# EAGLE board fb_in_8_230V_02 (EAGLE 4.16)
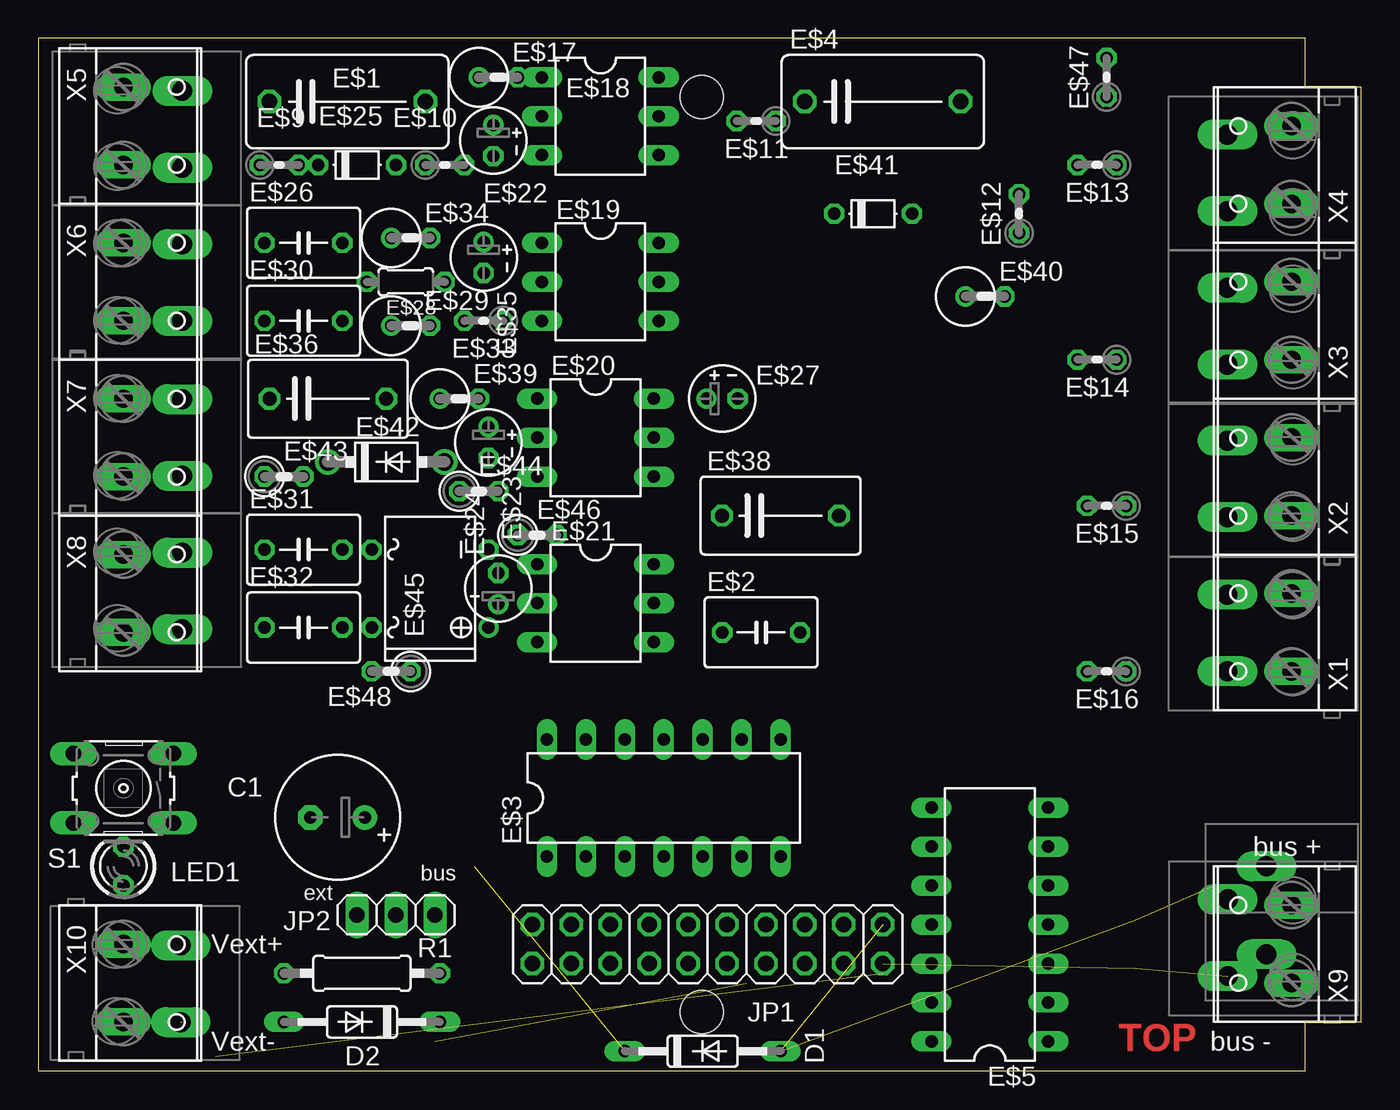
[diagram p0: board, top side]
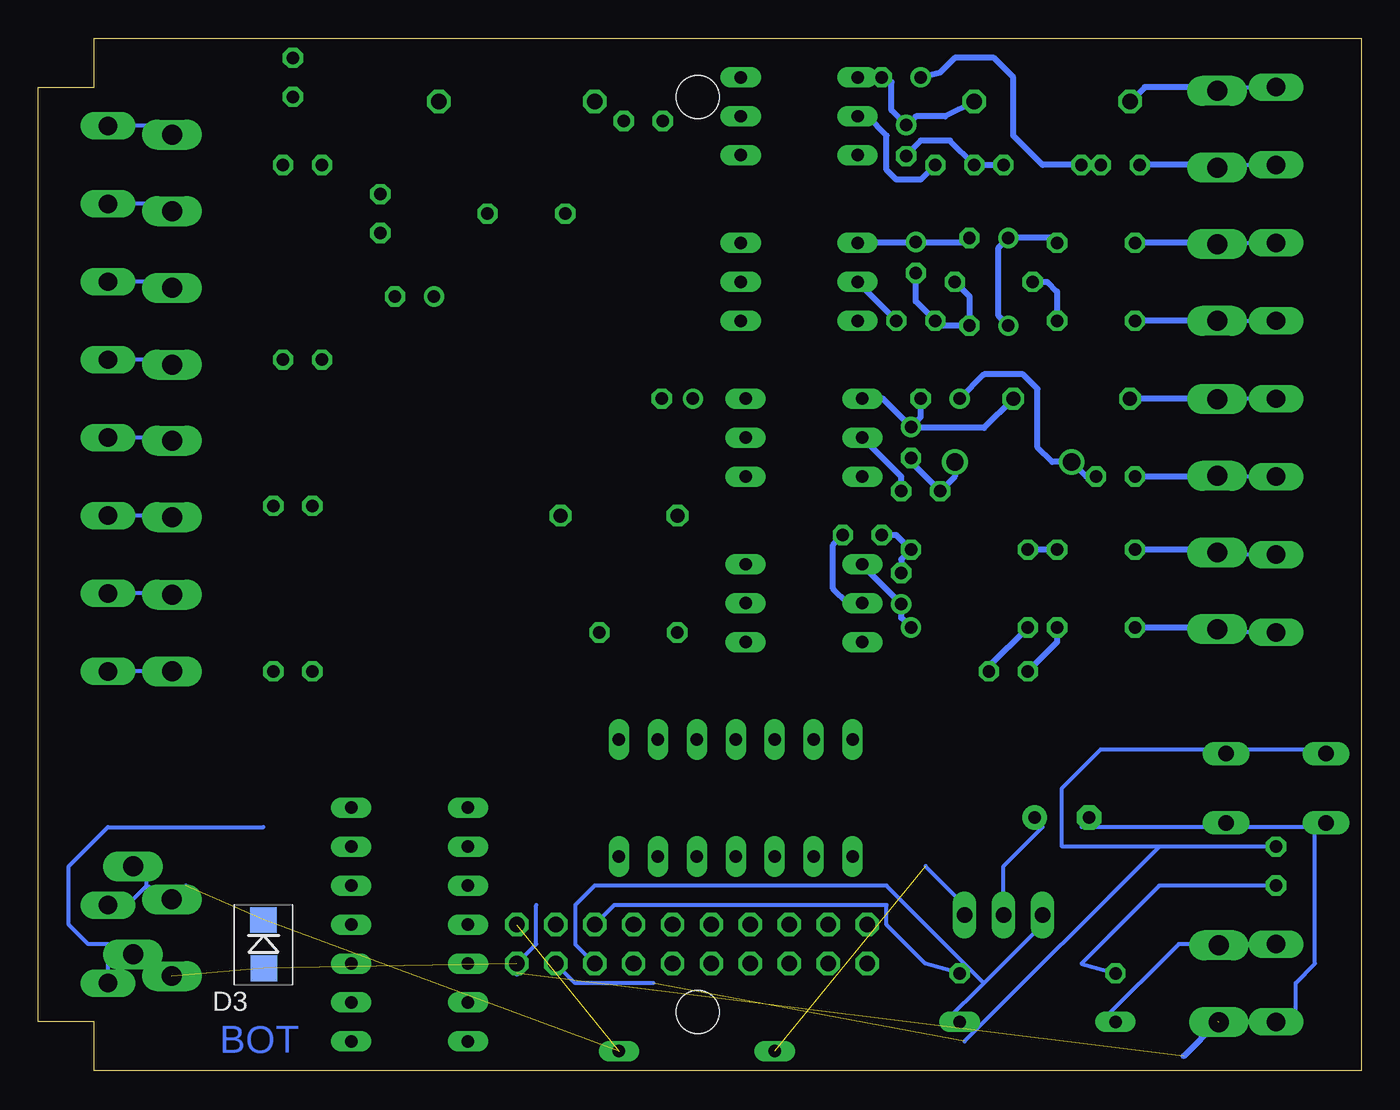
[diagram p1: board, bottom side, seen from below]

Size 86.28 x 67.31 mm. Coordinates in mm from the lower left corner, seen from the top.
Outline: 0,0.01 82.64,0 82.64,3.18 86.28,3.18 86.28,64.13 82.64,64.13 82.64,67.31 0,67.31 0,0.01
Copper layers (1*16): Top 0.035mm / dielectric 1.5mm / Bottom 0.035mm
Design rules "default": minimum track width 10mil, minimum drill 24mil, track to track 16mil, track to pad 12mil, pad to pad 16mil, via to via 16mil, smd to smd 8mil, copper to edge 20mil, drill to drill 10mil, minimum pad ring 10mil, minimum via ring 8mil, stop-mask expansion 4mil, vias tented up to drill 0mil, thermal gap 10mil
Holes 2.8 mm at 43.27,3.81 43.27,63.5
tRestrict: area 36,20.3 to 37.3,67.3; area 57,22.2 to 58.3,69.2
bRestrict: area 57,22.2 to 58.3,69.2; area 36,20.3 to 37.3,67.3

## Footprints (pad centres in the part's own frame; a part is rotated, then mirrored left to right if it is on the bottom)
E3,5-8 = drill 0.813 pad 1.6 round: + -1.778,0 | drill 0.813 pad 1.6 octagon: - 1.778,0
DO35-10 = drill 0.813 long: A 5.08,0; C -5.08,0
SMA = smd 1.67 x 1.73: 1 -1.576,0; 2 1.58,0.014
C102-064X133 = drill 1.016 octagon: 1 -5.08,0; 2 5.08,0
C050-045X075 = drill 0.813 octagon: 1 -2.54,0; 2 2.54,0
DIL14 = drill 0.813 long: 1 -7.62,-3.81; 2 -5.08,-3.81; 3 -2.54,-3.81; 4 0,-3.81; 5 2.54,-3.81; 6 5.08,-3.81; 7 7.62,-3.81; 8 7.62,3.81; 9 5.08,3.81; 10 2.54,3.81; 11 0,3.81; 12 -2.54,3.81; 13 -5.08,3.81; 14 -7.62,3.81
0204V = drill 0.813 octagon: 1 -1.27,0; 2 1.27,0
RAD2,5 = drill 0.813 octagon: A 1.27,0 | drill 0.813 round: C -1.27,0
DIL06 = drill 0.813 long: 1 -2.54,-3.81; 2 0,-3.81; 3 2.54,-3.81; 4 2.54,3.81; 5 0,3.81; 6 -2.54,3.81
E2-4 = drill 0.813 pad 1.27 round: + -1.016,0 | drill 0.813 pad 1.27 octagon: - 1.016,0
D-5 = drill 0.813 octagon: A 2.54,0; C -2.54,0
0204/5 = drill 0.813 octagon: 1 -2.54,0; 2 2.54,0
C075-052X106 = drill 0.914 octagon: 1 -3.81,0; 2 3.81,0
DO41-7 = drill 1.118 round: A 3.81,0; C -3.81,0
0207/2V = drill 0.813 octagon: 1 -1.27,0; 2 1.27,0
B-DIL = drill 0.813 round: + -2.54,-3.81 | drill 0.813 octagon: - 2.54,-3.81; AC1 2.54,3.81; AC2 -2.54,3.81
2X10 = drill 1.016 octagon: 1 -11.43,-1.27; 2 -11.43,1.27; 3 -8.89,-1.27; 4 -8.89,1.27; 5 -6.35,-1.27; 6 -6.35,1.27; 7 -3.81,-1.27; 8 -3.81,1.27; 9 -1.27,-1.27; 10 -1.27,1.27; 11 1.27,-1.27; 12 1.27,1.27; 13 3.81,-1.27; 14 3.81,1.27; 15 6.35,-1.27; 16 6.35,1.27; 17 8.89,-1.27; 18 8.89,1.27; 19 11.43,-1.27; 20 11.43,1.27
1X03 = drill 1.016 long: 1 -2.54,0; 2 0,0; 3 2.54,0
LED3MM = drill 0.813 octagon: A -1.27,0; K 1.27,0
0207/10 = drill 0.813 octagon: 1 -5.08,0; 2 5.08,0
B3F-10XX = drill 1.016 long: 1 -3.251,2.261; 2 3.251,2.261; 3 -3.251,-2.261; 4 3.251,-2.261
BUSKLEMME243-724 = drill 1.3 long: 1 -2.875,0; 2 2.875,0
W237-132 = drill 1.194 long: 1 -2.54,-0.635; 2 2.54,-0.635
AKL007-02 = drill 1.3 long: 1 -2.45,2.325; 2 2.55,2.325

## Placement (x,y rotation side)
C1  10µ  [E3,5-8]  19.52,16.51 180 top
D1  1N4148  [DO35-10]  43.33,1.27 0 top
D2  1N4148  [DO35-10]  21.11,3.17 180 top
D3  [SMA]  71.59,8.26 270 bottom
E$1  [C102-064X133]  20.15,63.18 0 top
E$2  459830 conrad  [C050-045X075]  47.14,28.58 0 top
E$3  [DIL14]  40.79,17.78 0 top
E$4  [C102-064X133]  55.08,63.18 0 top
E$5  [DIL14]  62.06,9.53 90 top
E$9  [0204V]  15.71,59.05 0 top
E$10  [0204V]  26.5,59.05 0 top
E$11  [0204V]  46.82,61.91 180 top
E$12  [0204V]  63.97,55.88 90 top
E$13  [0204V]  69.05,59.05 180 top
E$14  [0204V]  69.05,46.35 180 top
E$15  [0204V]  69.69,36.83 180 top
E$16  [0204V]  69.69,26.04 180 top
E$17  [RAD2,5]  30,64.77 0 top
E$18  [DIL06]  36.66,62.23 270 top
E$19  [DIL06]  36.66,51.43 270 top
E$20  [DIL06]  36.35,41.27 270 top
E$21  [DIL06]  36.35,30.48 270 top
E$22  [E2-4]  29.68,60.64 270 top
E$23  [E2-4]  29.36,40.96 270 top
E$24  [E2-4]  30,31.43 90 top
E$25  [D-5]  20.79,59.05 0 top
E$26  [C050-045X075]  17.3,53.98 0 top
E$27  SM 10/16RAD Reichelt  [E2-4]  44.6,43.81 0 top
E$28  [0204/5]  23.96,51.43 180 top
E$29  [RAD2,5]  24.28,48.58 0 top
E$30  [C050-045X075]  17.3,48.89 0 top
E$31  [C050-045X075]  17.3,33.97 0 top
E$32  [C050-045X075]  17.3,28.89 0 top
E$33  [0204V]  29.04,48.89 180 top
E$34  [RAD2,5]  24.28,54.29 0 top
E$35  [E2-4]  29.04,53.02 270 top
E$36  [C075-052X106]  18.88,43.81 0 top
E$38  450350 conrad  [C075-052X106]  48.41,36.2 0 top
E$39  [RAD2,5]  27.46,43.81 0 top
E$40  [RAD2,5]  61.75,50.48 0 top
E$41  [D-5]  54.45,55.88 0 top
E$42  [DO41-7]  22.7,39.69 0 top
E$43  [0207/2V]  16.03,38.73 0 top
E$44  [0207/2V]  28.73,37.78 0 top
E$45  [B-DIL]  25.55,31.43 90 top
E$46  [0207/2V]  32.54,34.92 0 top
E$47  [0204V]  69.69,64.77 90 top
E$48  [0207/2V]  23.01,26.04 180 top
JP1  [2X10]  43.65,8.26 180 top
JP2  [1X03]  23.33,10.16 0 top
LED1  rot  [LED3MM]  5.55,13.33 90 top
R1  1k  [0207/10]  21.11,6.35 180 top
S1  push Prog  [B3F-10XX]  5.55,18.42 180 top
U$1  EIB  [BUSKLEMME243-724]  80.11,10.45 90 top
X1  [W237-132]  81.11,28.58 90 top
X2  [W237-132]  81.11,38.73 90 top
X3  [W237-132]  81.11,48.89 90 top
X4  [W237-132]  81.11,59.05 90 top
X5  [W237-132]  6.18,61.59 270 top
X6  [W237-132]  6.18,51.43 270 top
X7  [W237-132]  6.18,41.27 270 top
X8  [W237-132]  6.18,31.12 270 top
X9  [W237-132]  81.11,8.26 90 top
X10  [W237-132]  6.18,5.71 270 top
X11  [AKL007-02]  79.89,28.49 90 top
X12  [AKL007-02]  79.89,38.53 90 top
X13  [AKL007-02]  79.89,48.49 90 top
X14  [AKL007-02]  79.89,58.49 90 top
X15  [AKL007-02]  7.07,61.43 270 top
X16  [AKL007-02]  7.07,51.43 270 top
X17  [AKL007-02]  7.07,41.34 270 top
X18  [AKL007-02]  7.07,31.34 270 top
X19  [AKL007-02]  79.9,8.62 90 top
X20  [AKL007-02]  6.96,5.71 270 top

## Library data of the parts
C1 E$1 E$2 E$4 E$9-E$16 E$22-E$24 E$26-E$28 E$30-E$33 E$35 E$36 E$38 E$43 E$44 E$46-E$48 R1 = rcl
D1 D2 E$17 E$25 E$29 E$34 E$39-E$42 = diode
D3 = semicon-smd-ipc
E$3 E$5 = 74xx-eu
E$18-E$21 = optocoupler
E$45 = rectifier
JP1 JP2 = pinhead
LED1 = led
S1 = switch-omron
U$1 = con-wago
X1-X20 = con-wago-500

## Nets
GND: C1.- D3.2 JP1.2 S1.1 S1.2 U$1.1 X9.1 X10.2 X19.1 X20.2
IO1: JP1.16
IO2: JP1.15
IO3: JP1.14
IO4: JP1.13
IO5: JP1.10
IO6: JP1.9
IO7: JP1.8
IO8: JP1.7
N$1: X4.1 X14.1
N$2: X4.2 X14.2
N$3: X3.1 X13.1
N$4: X3.2 X13.2
N$5: X2.1 X12.1
N$6: X2.2 X12.2
N$7: X1.1 X11.1
N$8: X1.2 X11.2
N$9: E$30.1 X6.2 X16.2
N$10: E$26.1 X6.1 X16.1
N$11: E$43.1 X7.2 X17.2
N$12: E$31.1 X8.1 X18.1
N$14: E$1.1 X5.1 X15.1
N$15: E$36.1 X7.1 X17.1
N$16: E$32.1 X8.2 X18.2
N$17: D2.A X10.1 X20.1
N$20: D1.A D3.1 JP1.1 U$1.2 X9.2 X19.2
N$24: JP1.5 R1.1
N$27: JP1.4 LED1.K S1.3 S1.4
N$28: LED1.A R1.2
N$31: D2.C JP1.6 JP2.1
N$32: D1.C JP2.3
N$33: JP1.3
S$1: E$10.2 E$18.2
S$2: E$1.2 E$17.A E$18.1 E$22.+
S$3: E$9.1 X5.2 X15.2
S$4: E$10.1 E$22.- E$25.A
S$5: E$9.2 E$17.C E$25.C
S$6: E$26.2 E$29.C E$34.C
S$7: E$19.1 E$34.A E$35.+
S$8: E$19.2 E$33.1
S$9: E$28.1 E$29.A E$33.2 E$35.-
S$10: E$28.2 E$30.2
S$11: E$31.2 E$45.AC1
S$12: E$20.1 E$23.+ E$36.2 E$39.A
S$13: E$23.- E$42.A E$44.1
S$14: E$20.2 E$44.2
S$15: E$39.C E$42.C E$43.2
S$16: E$32.2 E$48.2
S$17: E$45.AC2 E$48.1
S$18: E$24.- E$45.- E$46.1
S$19: E$21.2 E$46.2
S$20: E$21.1 E$24.+ E$45.+
VDD: C1.+ JP2.2

## Tracks (layer width: path | path; a pad name or v marks a point on that pad's centre or on a via)
GND  (4 unrouted)
  Bottom 0.254: X9.1 81.75,6.98 U$1.1 | X19.1 79.21,6.98 U$1.1 | 71.59,15.88 81.75,15.88 84.29,13.33 84.29,9.53 83.02,8.26 81.75,8.26 U$1.1 | 53.81,10.79 53.81,8.26 JP1.2 | X20.2 8.09,3.17 X10.2 4.28,3.17 4.28,5.71 3.01,6.98 3.01,15.88 | 3.01,15.88 8.09,15.88 S1.1 9.36,15.88 18.25,15.88 C1.- | 3.01,15.88 S1.2
  Bottom 0.406: 11.58,0.95 9.36,3.17 | 55.08,6.35 JP1.2
N$1
  Bottom 0.254: X4.1 79.21,56.52 X14.1
N$2
  Bottom 0.254: X4.2 79.21,61.59 X14.2
N$3
  Bottom 0.254: X3.1 79.21,46.35 X13.1
N$4
  Bottom 0.254: X3.2 79.21,51.43 X13.2
N$5
  Bottom 0.254: X2.1 79.21,36.2 X12.1
N$6
  Bottom 0.254: X2.2 79.21,41.27 X12.2
N$7
  Bottom 0.254: X1.1 79.21,26.04 X11.1
N$8
  Bottom 0.254: X1.2 79.21,31.12 X11.2
N$9
  Bottom 0.254: X6.2 8.09,48.89 X16.2
  Bottom 0.406: X16.2 E$30.1
N$10
  Bottom 0.254: X6.1 8.09,53.98 X16.1
  Bottom 0.406: X16.1 9.49,53.98 E$26.1
N$11
  Bottom 0.254: X7.2 8.09,38.73 X17.2
  Bottom 0.406: X17.2 9.45,38.73 E$43.1
N$12
  Bottom 0.254: X8.1 8.09,33.66 X18.1
  Bottom 0.406: X18.1 9.58,33.97 E$31.1
N$14
  Bottom 0.254: X5.1 8.09,64.14 X15.1
  Bottom 0.406: X15.1 9.65,64.14 14.12,64.14 E$1.1
N$15
  Bottom 0.254: X7.1 8.09,43.81 X17.1
  Bottom 0.406: X17.1 9.43,43.81 E$36.1
N$16
  Bottom 0.254: X8.2 8.09,28.58 X18.2
  Bottom 0.406: X18.2 9.5,28.89 E$32.1
N$17
  Bottom 0.254: D2.A 16.98,3.17 11.9,8.26 10.63,8.26 X20.1 8.09,8.26 X10.1
N$20  (3 unrouted)
  Bottom 0.254: 79.21,12.06 80.48,10.79 X9.2 | 79.21,12.06 79.21,13.33 U$1.2 | 79.21,12.06 X19.2 76.67,12.06
N$24
  Bottom 0.254: JP1.5 48.73,10.79 30.95,10.79 30.95,9.53 28.41,6.98 R1.1
N$27  (1 unrouted)
  Bottom 0.254: 13.17,14.61 19.52,14.61 19.52,18.42 16.98,20.96 9.36,20.96 S1.3 8.09,20.96 3.01,20.96 S1.4 | LED1.K 13.17,14.61 | JP1.4 51.27,5.71 46.19,5.71 | 13.17,14.61 25.87,1.91
N$28
  Bottom 0.254: LED1.A 13.17,12.06 18.25,6.98 R1.2
N$31
  Bottom 0.254: 24.6,5.71 20.79,9.53 JP2.1 | 24.6,5.71 27.14,3.17 D2.C | JP1.6 51.27,8.26 51.27,10.79 50,12.06 30.95,12.06 24.6,5.71
N$32  (1 unrouted)
  Bottom 0.254: 28.41,13.33 25.87,10.79 JP2.3
S$1
  Bottom 0.406: E$10.2 28.73,58.1 30.31,58.1 30.95,58.74 30.95,60.96 32.22,62.23 E$18.2
S$2
  Bottom 0.406: E$1.2 27.14,62.23 29.04,62.23 E$22.+ 30.63,62.61 30.63,64.45 30.95,64.77 E$17.A 32.54,65.09 E$18.1
S$3
  Bottom 0.254: X5.2 8.09,59.05 X15.2
  Bottom 0.406: X15.2 9.57,59.05 E$9.1
S$4
  Bottom 0.406: E$25.A E$10.1 26.82,60.64 28.73,60.64 E$22.-
S$5
  Bottom 0.406: E$9.2 E$25.C 20.79,59.05 22.7,60.96 22.7,64.77 23.96,66.04 26.5,66.04 27.46,65.09 E$17.C
S$6
  Bottom 0.406: E$26.2 20.15,54.29 E$34.C 23.65,53.66 23.65,49.21 E$29.C
S$7
  Bottom 0.406: E$34.A 25.55,53.98 29.04,53.98 | E$35.+ 29.04,53.98 | 29.04,53.98 E$19.1
S$8
  Bottom 0.406: E$19.2 E$33.1
S$9
  Bottom 0.406: 29.04,52.07 E$35.- 29.04,50.16 E$33.2 27.46,48.58 E$29.A 25.55,50.48 E$28.1
S$10
  Bottom 0.406: E$28.2 20.47,51.43 19.84,50.8 E$30.2
S$11
  Bottom 0.406: E$31.2 E$45.AC1
S$12
  Bottom 0.406: E$23.+ 29.36,41.91 24.6,41.91 E$36.2 | E$23.+ 28.73,42.61 E$39.A | E$23.+ 31.2,43.81 E$20.1
S$13
  Bottom 0.406: E$23.- 29.36,39.69 E$44.1 26.5,38.73 E$42.A
S$14
  Bottom 0.406: E$44.2 30,38.73 E$20.2
S$15
  Bottom 0.406: 17.61,38.73 E$43.2 17.93,38.73 | 17.93,38.73 E$42.C | E$42.C 20.15,39.69 21.11,40.64 21.11,44.45 22.06,45.4 24.6,45.4 E$39.C | 17.93,38.73 E$42.C
S$16
  Bottom 0.406: E$32.2 19.84,27.94 E$48.2
S$17
  Bottom 0.406: E$45.AC2 24.28,26.35 E$48.1
S$18
  Bottom 0.406: E$46.1 30.31,34.92 E$45.- 30,33.34 E$24.- 30,32.38
S$19
  Bottom 0.406: E$21.2 33.49,30.48 34.44,31.43 34.44,34.29 E$46.2
S$20
  Bottom 0.406: E$24.+ 30,30.48 | E$45.+ 30,29.53 E$24.+ | E$24.+ 32.54,32.96 E$21.1
VDD
  Bottom 0.254: JP2.2 23.33,13.33 20.79,15.88 C1.+

## Text on the board
Top: TOP
Bottom: BOT
tPlace: bus + | bus | ext | Vext+ | Vext- | bus -
tValues: fb_in_8_230V_02